# EAGLE board 4Bit Computer - 4 Bit Adder - 74S283N (EAGLE 7.6.0)
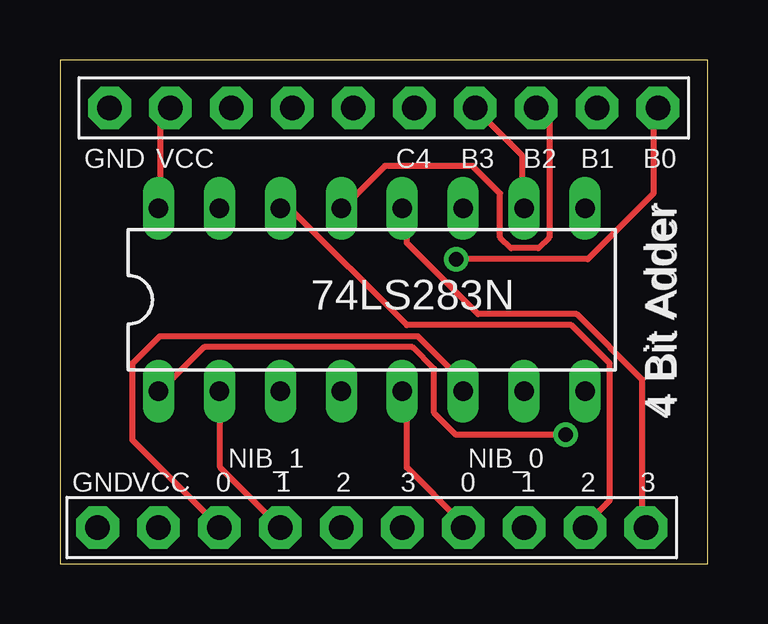
[diagram p0: board, top side]
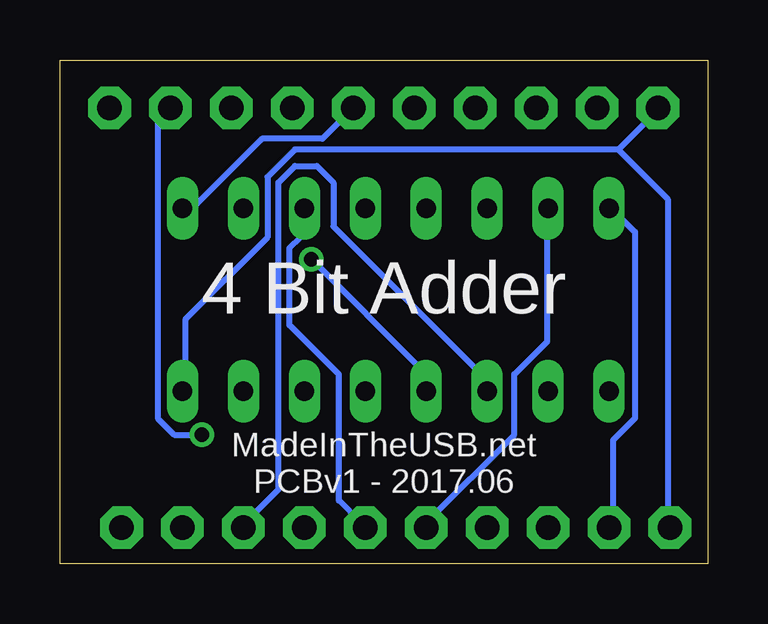
[diagram p1: board, bottom side, seen from below]

Size 27 x 21 mm. Coordinates in mm from the lower left corner, seen from the top.
Outline: 0,0 27,0 27,21 0,21 0,0
Copper layers (1*16): Top 0.035mm / dielectric 1.5mm / Bottom 0.035mm
Design rules "default": minimum track width 10mil, minimum drill 24mil, track to track 8mil, track to pad 8mil, pad to pad 8mil, via to via 8mil, smd to smd 8mil, copper to edge 40mil, drill to drill 8mil, minimum pad ring 10mil, minimum via ring 8mil, stop-mask expansion 4mil, vias tented up to drill 0mil, thermal gap 10mil

## Footprints (pad centres in the part's own frame; a part is rotated, then mirrored left to right if it is on the bottom)
DIL16 = drill 0.813 long: 1 -8.89,-3.81; 2 -6.35,-3.81; 3 -3.81,-3.81; 4 -1.27,-3.81; 5 1.27,-3.81; 6 3.81,-3.81; 7 6.35,-3.81; 8 8.89,-3.81; 9 8.89,3.81; 10 6.35,3.81; 11 3.81,3.81; 12 1.27,3.81; 13 -1.27,3.81; 14 -3.81,3.81; 15 -6.35,3.81; 16 -8.89,3.81
1X10-BIG = drill 1.016 pad 1.778 octagon: 1 -11.43,0; 2 -8.89,0; 3 -6.35,0; 4 -3.81,0; 5 -1.27,0; 6 1.27,0; 7 3.81,0; 8 6.35,0; 9 8.89,0; 10 11.43,0

## Placement (x,y rotation side)
74LS283N  74LS283N  [DIL16]  13,11 0 top
BITS_IN  PINHD-1X10  [1X10-BIG]  13,1.5 180 top
BITS_OUT  PINHD-1X10  [1X10-BIG]  13.5,19 180 top

## Library data of the parts
74LS283N = 74xx-eu
BITS_IN BITS_OUT = adafruit

## Nets
B0_IN_0: 74LS283N.5 BITS_IN.4
B0_IN_1: 74LS283N.3 BITS_IN.3
B0_IN_2: 74LS283N.14 BITS_IN.2
B0_IN_3: 74LS283N.12 BITS_IN.1
B1_IN_0: 74LS283N.6 BITS_IN.8
B1_IN_1: 74LS283N.2 BITS_IN.7
B1_IN_2: 74LS283N.15 BITS_IN.6
B1_IN_3: 74LS283N.11 BITS_IN.5
BIT_OUT_0: 74LS283N.4 BITS_OUT.1
BIT_OUT_1: 74LS283N.1 BITS_OUT.2
BIT_OUT_3: 74LS283N.10 BITS_OUT.4
C4: 74LS283N.13 BITS_OUT.3
CARRY_IN_0: 74LS283N.7
CARRY_OUT_4: 74LS283N.9 BITS_OUT.5
GND: 74LS283N.8 BITS_IN.10 BITS_OUT.10
VCC: 74LS283N.16 BITS_IN.9 BITS_OUT.9

## Tracks (layer width: path | path; a pad name or v marks a point on that pad's centre or on a via)
B0_IN_0
  Top 0.254: 74LS283N.5 14.46,6.97 14.46,4 16.75,1.72 BITS_IN.4
B0_IN_1
  Bottom 0.254: 74LS283N.3 9.2,7.2 9.2,7.66 15.6,14.06 15.6,15.89 16.29,16.57 17.2,16.57 17.89,15.89 17.89,3.09 19.26,1.72 BITS_IN.3
B0_IN_2
  Top 0.254: 74LS283N.14 9.2,14.75 9.66,14.75 14.46,9.95 21.32,9.95 22.92,8.34 22.92,2.63 22,1.72 BITS_IN.2
B0_IN_3
  Top 0.254: 74LS283N.12 14.46,14.75 14.46,13.38 17.43,10.4 21.55,10.4 24.29,7.66 24.29,1.72 BITS_IN.1
B1_IN_0
  Top 0.254: 74LS283N.6 16.75,7.2 16.75,7.66 14.92,9.49 4.17,9.49 3.03,8.34 3.03,5.14 6.46,1.72 BITS_IN.8
B1_IN_1
  Top 0.254: 74LS283N.2 6.69,6.97 6.69,4 8.97,1.72 BITS_IN.7
B1_IN_2
  Bottom 0.254: 74LS283N.15 6.69,14.75 6.69,9.26 8.06,7.89 8.06,5.37 11.72,1.72 BITS_IN.6
B1_IN_3
  Bottom 0.254: 74LS283N.11 16.97,14.75 16.97,13.6 17.43,13.15 17.43,9.95 15.37,7.89 15.37,2.63 14.46,1.72 BITS_IN.5
BIT_OUT_0  (via drill 0.61)
  Top 0.254: v16.52,12.69 22,12.69 24.75,15.43 24.75,18.86 BITS_OUT.1
  Bottom 0.254: v16.52,12.69 11.95,8.12 11.95,7.2 74LS283N.4
BIT_OUT_1  (via drill 0.61)
  Top 0.254: v21.09,5.37 16.52,5.37 15.6,6.29 15.6,8.12 14.69,9.03 6,9.03 4.17,7.2 74LS283N.1
  Bottom 0.254: v21.09,5.37 22.23,5.37 22.92,6.06 22.92,18.4 22.46,18.86 BITS_OUT.2
BIT_OUT_3
  Top 0.254: 74LS283N.10 19.26,14.98 19.26,17.03 17.43,18.86 BITS_OUT.4
C4
  Top 0.254: 74LS283N.13 11.95,14.98 13.54,16.57 17.2,16.57 18.34,15.43 18.34,13.6 18.8,13.15 19.95,13.15 20.4,13.6 20.4,18.4 19.95,18.86 BITS_OUT.3
CARRY_OUT_4
  Bottom 0.254: 74LS283N.9 21.77,14.98 21.32,14.98 18.57,17.72 16.06,17.72 14.92,18.86 BITS_OUT.5
GND
  Bottom 0.254: 3.71,17.26 17.2,17.26 18.34,16.12 18.34,13.6 21.77,10.17 21.77,7.2 74LS283N.8 | 3.71,17.26 2.12,18.86 BITS_OUT.10 | 3.71,17.26 1.66,15.2 1.66,1.72 BITS_IN.10
VCC
  Top 0.254: 74LS283N.16 4.17,14.98 4.17,18.63 4.4,18.86 BITS_OUT.9
  Bottom 0.254: BITS_IN.9 3.94,1.72 3.94,5.14 3.03,6.06 3.03,13.83 3.94,14.75 74LS283N.16

## Text on the board
tNames: GND | VCC | C4 | B3 | B2 | B1 | B0 | 4 Bit Adder | 4 Bit Adder | NIB_1 | NIB_0 | GND | VCC | 0 | 1 | 2 | 3 | 0 | 1 | 2 | 3
bNames: 4 Bit Adder | MadeInTheUSB.net / PCBv1 - 2017.06